# EAGLE board IRis - Slave PCB Layout (EAGLE 8.7.0)
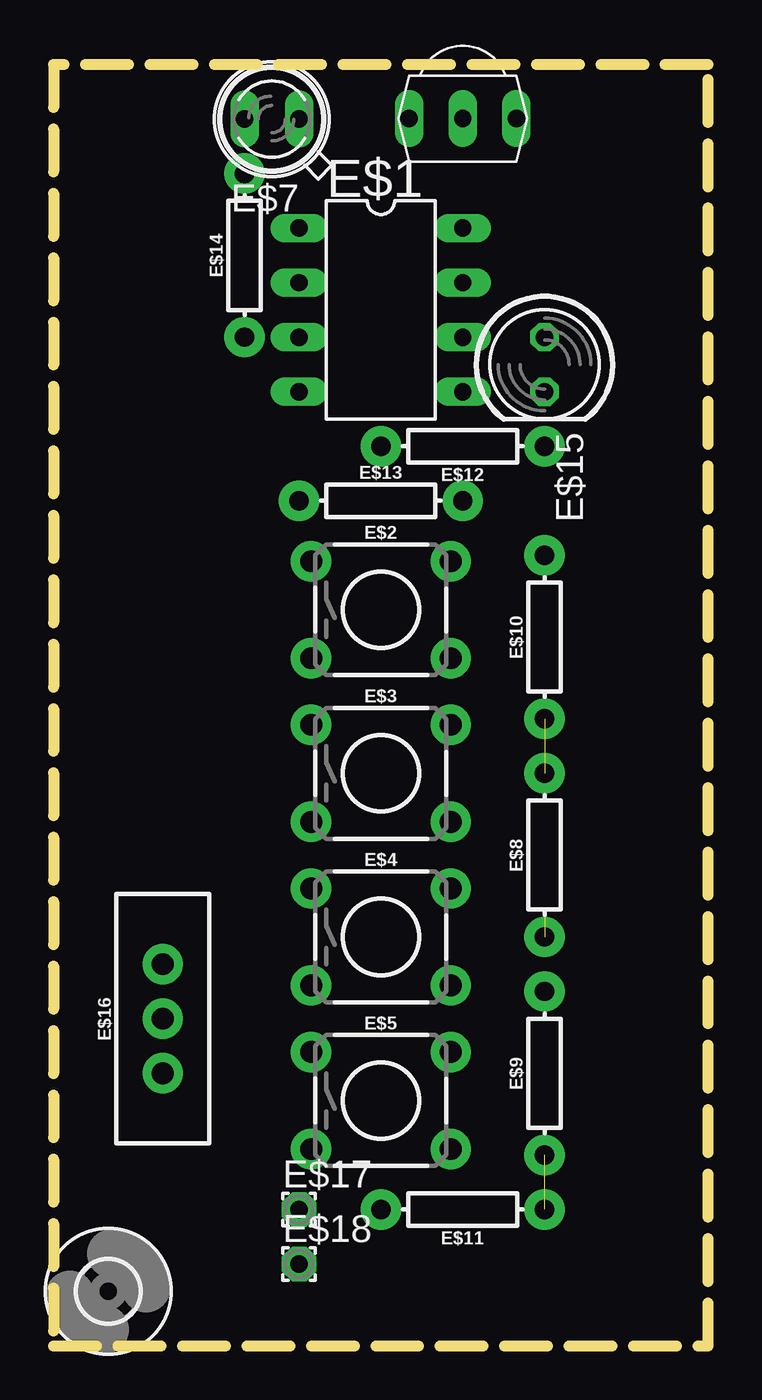
[diagram p0: board, top side]
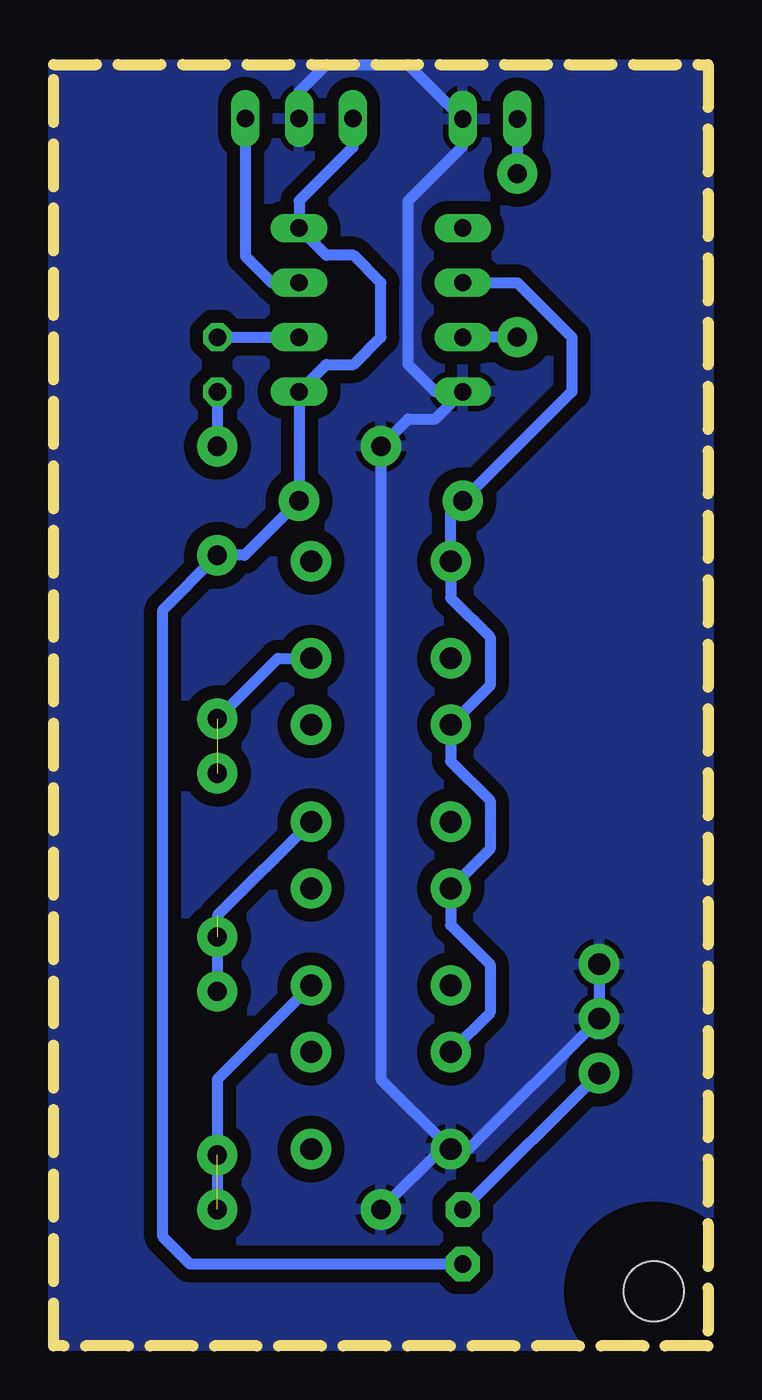
[diagram p1: board, bottom side, seen from below]

Size 30.48 x 59.69 mm. Coordinates in mm from the lower left corner, seen from the top.
Outline: 0,0 30.48,0 30.48,59.69 0,59.69 0,0
Copper layers (1*16): Top 0.035mm / dielectric 1.5mm / Bottom 0.035mm
Design rules "default *": minimum track width 6mil, minimum drill 0.35mm, track to track 6mil, track to pad 6mil, pad to pad 6mil, via to via 6mil, smd to smd 6mil, copper to edge 0mil, drill to drill 6mil, minimum pad ring 10mil, minimum via ring 8mil, stop-mask expansion 4mil, vias tented up to drill 0mil, thermal gap 10mil

## Footprints (pad centres in the part's own frame; a part is rotated, then mirrored left to right if it is on the bottom)
DIL8 = drill 0.813 long: 1 -3.81,-3.81; 2 -1.27,-3.81; 3 1.27,-3.81; 4 3.81,-3.81; 5 3.81,3.81; 6 1.27,3.81; 7 -1.27,3.81; 8 -3.81,3.81
TACTILE_SWITCH_PTH_6.0MM = drill 1.016 pad 1.88: 1 -3.251,2.261; 2 3.251,2.261; 3 -3.251,-2.261; 4 3.251,-2.261
TSOP18XX = drill 0.813 long: GND -0.001,-0.027; OUT -2.501,-0.027; VCC 2.499,-0.027
SFH480 = drill 0.813 long: A 1.27,0; K -1.27,0
AXIAL-0.3 = drill 0.9 pad 1.88: P$1 -3.81,0; P$2 3.81,0
LED5MM = drill 0.813 octagon: A -1.27,0; K 1.27,0
SWITCH_SPDT_PTH_11.6X4.0MM = drill 1.016 pad 1.88: 1 0,2.54; 2 0,0; 3 0,-2.54
1,6/0,8 = drill 0.813 pad 1.6 octagon: 1 0,0
2,8 = hole 2.8: 0,0

## Placement (x,y rotation side)
E$1  [DIL8]  15.24,48.26 270 top
E$2  [TACTILE_SWITCH_PTH_6.0MM]  15.24,34.29 0 top
E$3  [TACTILE_SWITCH_PTH_6.0MM]  15.24,26.67 0 top
E$4  [TACTILE_SWITCH_PTH_6.0MM]  15.24,19.05 0 top
E$5  [TACTILE_SWITCH_PTH_6.0MM]  15.24,11.43 0 top
E$6  [TSOP18XX]  19.05,57.15 180 top
E$7  [SFH480]  10.16,57.15 180 top
E$8  [AXIAL-0.3]  22.86,22.86 90 top
E$9  [AXIAL-0.3]  22.86,12.7 90 top
E$10  [AXIAL-0.3]  22.86,33.02 90 top
E$11  [AXIAL-0.3]  19.05,6.35 180 top
E$12  [AXIAL-0.3]  19.05,41.91 180 top
E$13  [AXIAL-0.3]  15.24,39.37 0 top
E$14  [AXIAL-0.3]  8.89,50.8 90 top
E$15  [LED5MM]  22.86,45.72 270 top
E$16  [SWITCH_SPDT_PTH_11.6X4.0MM]  5.08,15.24 0 top
E$17  [1,6/0,8]  11.43,6.35 0 top
E$18  [1,6/0,8]  11.43,3.81 0 top
E$19  [2,8]  2.54,2.54 0 top

## Library data of the parts
E$1 = microchip
E$2-E$5 E$16 = SparkFun-Switches
E$6 = tsop
E$7 E$15 = led
E$8-E$14 = SparkFun-Resistors
E$17 E$18 = wirepad
E$19 = holes

## Nets
GND: E$1.4 E$5.3 E$6.GND E$7.K E$11.P$2 E$12.P$2 E$16.1 E$16.2
S$1: E$2.4 E$8.P$2 E$10.P$1
S$2: E$3.4 E$8.P$1 E$9.P$2
S$3: E$4.4 E$9.P$1 E$11.P$1
S$4: E$1.3 E$14.P$1
S$5: E$1.2 E$2.1 E$3.1 E$4.1 E$5.1 E$13.P$1
S$6: E$1.5 E$1.8 E$6.VCC E$10.P$2 E$13.P$2 E$18.1
S$7: E$7.A E$14.P$2
S$8: E$1.7 E$6.OUT
S$9: E$1.6 E$15.A
S$10: E$12.P$1 E$15.K
S$12: E$16.3 E$17.1

## Tracks (layer width: path | path; a pad name or v marks a point on that pad's centre or on a via)
GND
  Bottom 0.508: 12.21,9.38 15.24,12.42 E$12.P$2 13.97,43.18 12.7,43.18 E$1.4 12.7,44.45 13.97,45.72 13.97,53.34 11.43,55.88 E$7.K 13.97,59.69 17.78,59.69 19.05,58.42 E$6.GND | 12.21,9.38 E$5.3 11.15,9.17 E$16.2 E$16.1 | E$11.P$2 12.21,9.38
  pour Bottom (isolate 0.61): 0,0 30.48,0 30.48,59.69 0,59.69
S$1  (1 unrouted)
  Bottom 0.508: E$10.P$1 20.04,32.03 E$2.4
S$2  (1 unrouted)
  Bottom 0.508: E$3.4 22.86,20.04 E$9.P$2
S$3  (1 unrouted)
  Bottom 0.508: E$4.4 22.86,12.42 E$11.P$1
S$4
  Bottom 0.508: E$14.P$1 E$1.3
S$5
  Bottom 0.508: E$1.2 8.89,49.53 6.35,46.99 6.35,44.45 E$13.P$1 11.99,38.81 E$2.1 11.99,34.85 10.16,33.02 10.16,30.76 E$3.1 11.99,27.23 10.16,25.4 10.16,23.14 E$4.1 11.99,19.61 10.16,17.78 10.16,15.52 E$5.1
S$6
  Bottom 0.508: E$6.VCC 16.55,55.84 19.05,53.34 E$1.8 17.78,50.8 16.51,50.8 15.24,49.53 15.24,46.99 16.51,45.72 17.78,45.72 E$1.5 E$13.P$2 21.59,36.83 E$10.P$2 25.4,34.29 25.4,5.08 24.13,3.81 E$18.1
S$7
  Bottom 0.508: E$7.A E$14.P$2
S$8
  Bottom 0.508: E$6.OUT 21.55,50.76 20.32,49.53 E$1.7
S$9
  Bottom 0.508: E$15.A E$1.6
S$10
  Bottom 0.508: E$15.K E$12.P$1
S$12
  Bottom 0.508: E$16.3 E$17.1